# EAGLE board TiNRS&Navenant-Overstuurd (EAGLE 7.7.0), part 1 of 3
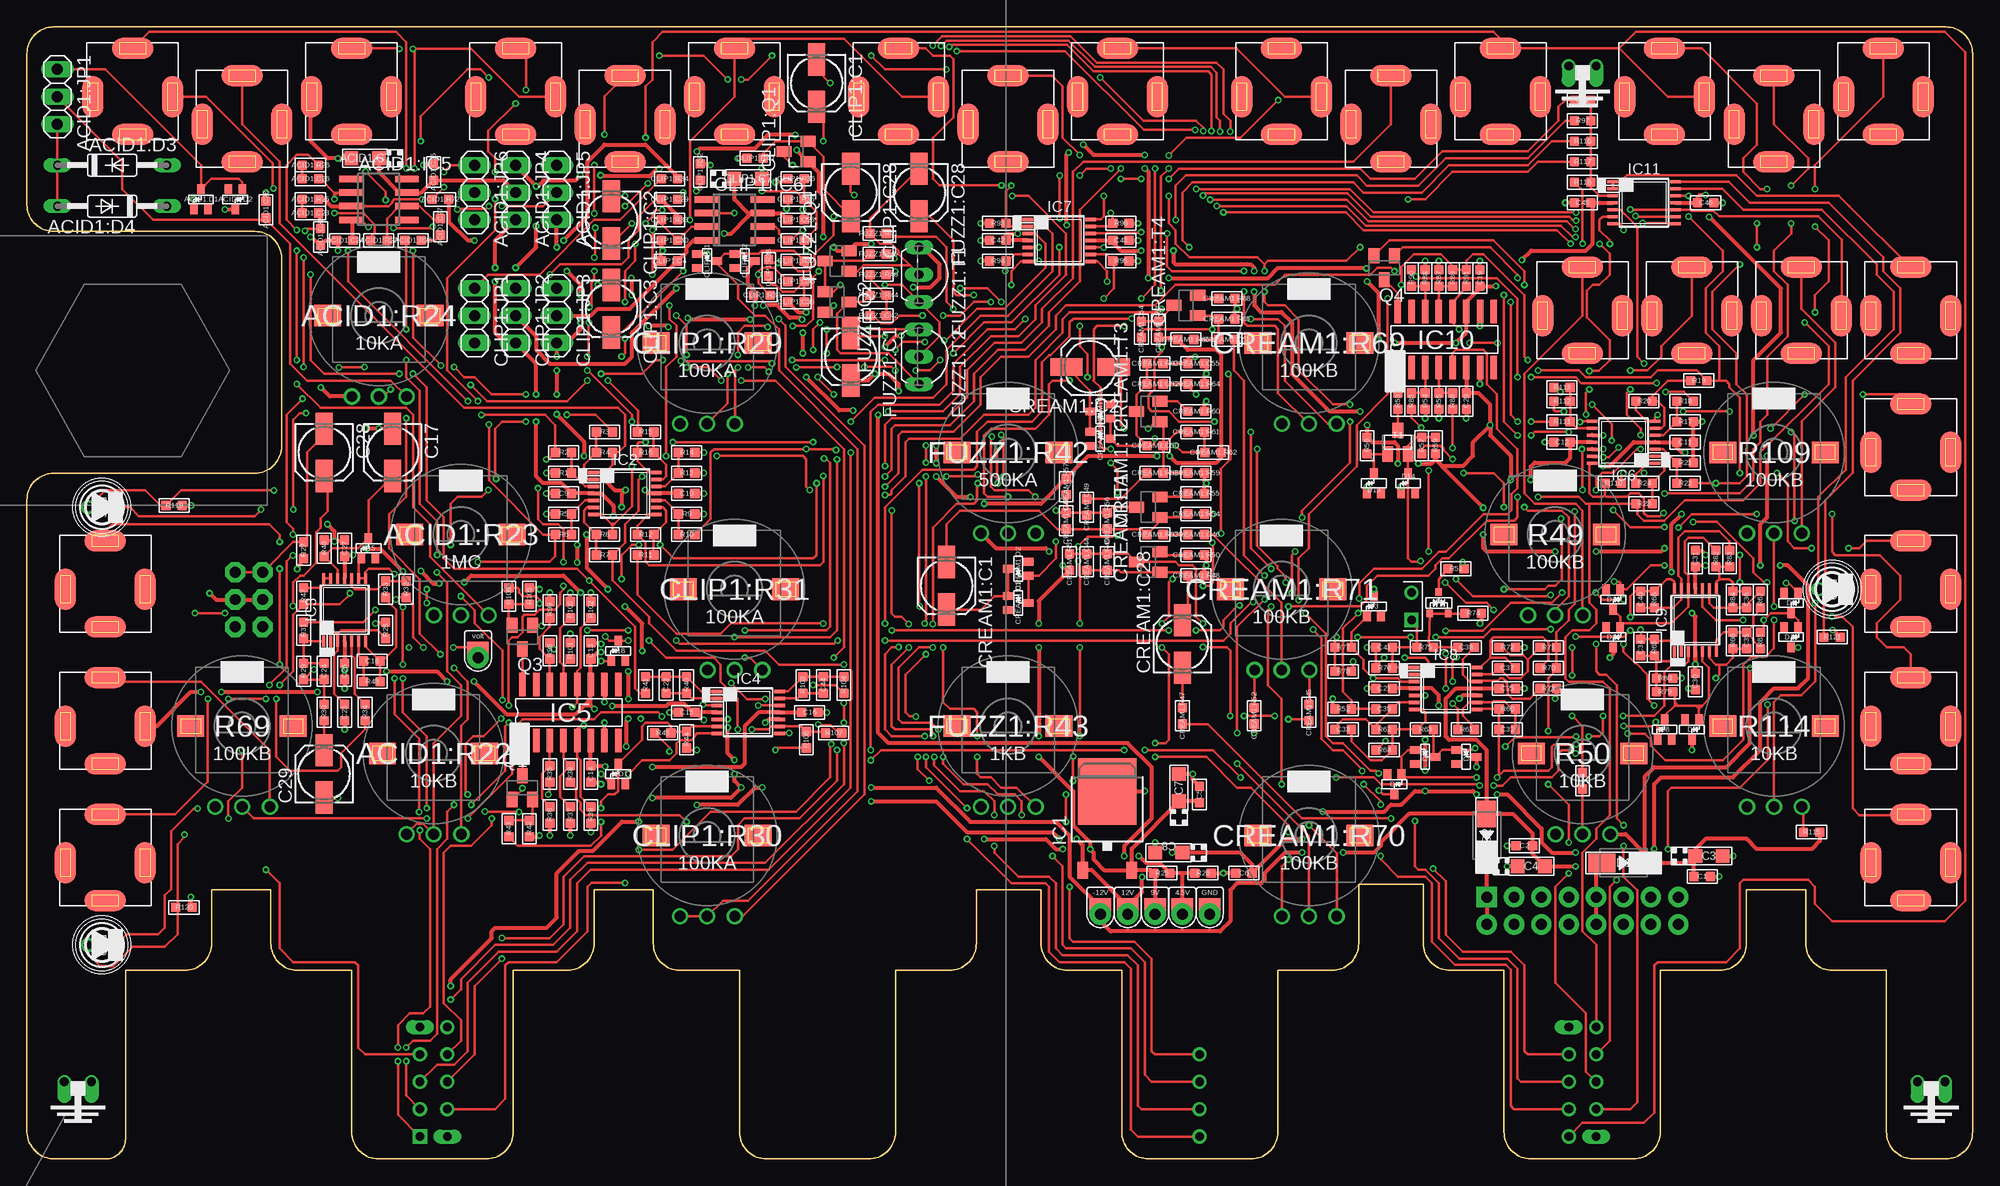
[diagram p0: board, top side]
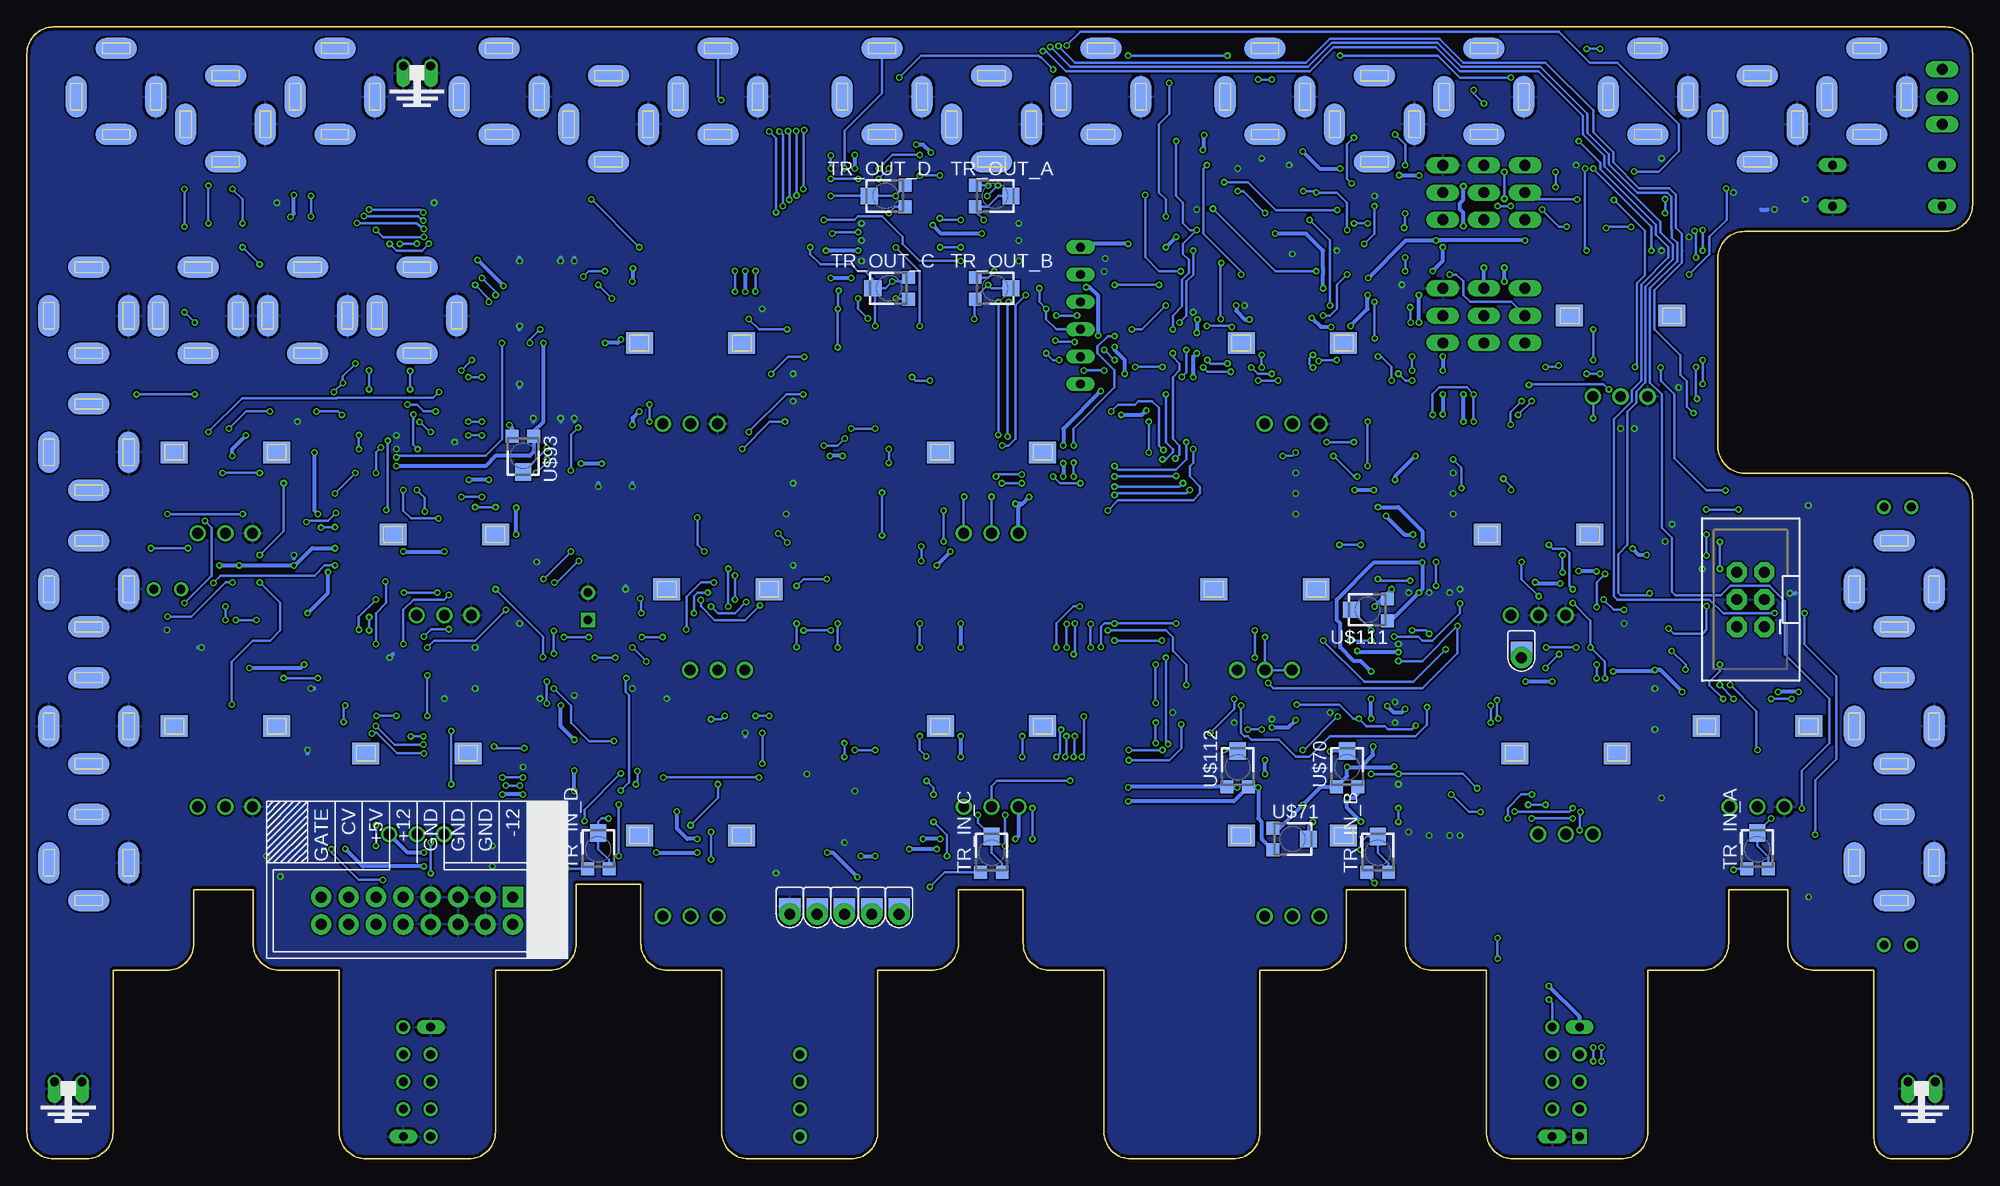
[diagram p1: board, bottom side, seen from below]

Size 180.66 x 105.08 mm. Coordinates in mm from the lower left corner, seen from the top.
Copper layers (1*16): Top 0.035mm / dielectric 1.5mm / Bottom 0.035mm
Design rules "ITeadstudio": minimum track width 6mil, minimum drill 12mil, track to track 6mil, track to pad 6mil, pad to pad 6mil, via to via 6mil, smd to smd 0mil, copper to edge 10mil, drill to drill 10mil, minimum pad ring 10mil, minimum via ring 6mil, stop-mask expansion 2mil, vias tented up to drill 100mil, thermal gap 10mil
Net classes: 0 default: width 0.254 mm; 1 power: width 0.381 mm

## Footprints (pad centres in the part's own frame; a part is rotated, then mirrored left to right if it is on the bottom)
CASE-A_3216 = smd 1.27 x 1.27: + -1.27,0; - 1.27,0
C0603 = smd 0.889 x 0.889: 1 -0.762,0; 2 0.762,0
SOT-323 = smd 0.7 x 0.9: ANODE -0.65,-0.95; CATHODE 0,0.95; NC 0.65,-0.95
DO35-10 = drill 0.813 long: A 5.08,0; C -5.08,0
SO08 = smd 0.6 x 2.2: 1 -1.905,-2.6; 2 -0.635,-2.6; 3 0.635,-2.6; 4 1.905,-2.6; 5 1.905,2.6; 6 0.635,2.6; 7 -0.635,2.6; 8 -1.905,2.6
1X03 = drill 1.016 long: 1 -2.54,0; 2 0,0; 3 2.54,0
ALPS_POT_SQUAREHOLES = drill 1: P$1 -2.5,-7.5; P$2 0,-7.5; P$3 2.58,-7.5 | smd 2.5 x 2: P$4 -4.75,0; P$5 4.75,0 | smd 2.5 x 2 bottom: P$6 -4.75,0; P$7 4.75,0
R0603 = smd 0.889 x 0.889: 1 -0.762,0; 2 0.762,0
153CLV-0505 = smd 3 x 1.6: + 2.2,0; - -2.2,0
SOT23 = smd 1 x 1.4: 1 -0.95,-1.1; 2 0.95,-1.1; 3 0,1.1
SOT23-BEC = smd 1 x 1.4: B -0.95,-1.1; C 0,1.1; E 0.95,-1.1
DO-214AC = smd 2.5 x 1.7: 1 -2,0; 2 2,0
3MMLED = drill 0.8: + -1.27,0; - 1.27,0
TO92-EBC = drill 0.813 long: B 0,-1.27; C 2.54,-1.27; E -2.54,-1.27
TO252 = smd 1 x 1.6: 1 -2.28,-4.8; 2 2.28,-4.8 | smd 5.4 x 6.2: 3 0,2.5
TSSOP14 = smd 0.305 x 0.991: 1 -1.95,-2.918; 2 -1.3,-2.918; 3 -0.65,-2.918; 4 0,-2.918; 5 0.65,-2.918; 6 1.3,-2.918; 7 1.95,-2.918; 8 1.95,2.918; 9 1.3,2.918; 10 0.65,2.918; 11 0,2.918; 12 -0.65,2.918; 13 -1.3,2.918; 14 -1.95,2.918
SO16 = smd 0.6 x 2.2: 1 -4.445,-2.6; 2 -3.175,-2.6; 3 -1.905,-2.6; 4 -0.635,-2.6; 5 0.635,-2.6; 6 1.905,-2.6; 7 3.175,-2.6; 8 4.445,-2.6; 9 4.445,2.6; 10 3.175,2.6; 11 1.905,2.6; 12 0.635,2.6; 13 -0.635,2.6; 14 -1.905,2.6; 15 -3.175,2.6; 16 -4.445,2.6
3.5MM-JACK-SWITCH-13MM-NOHOLES = smd 1.95 x 3.85 bottom: RING_B@1 -3.7,0; SWITCH_B@1 3.7,0 | smd 1.95 x 3.85: RING_T@3 -3.7,0; SWITCH_T@3 3.7,0 | smd 3.85 x 1.95 bottom: SECOND_B@1 0,-3.5; TIP_B@1 0,4.5 | smd 3.85 x 1.95: SECOND_T@3 0,-3.5; TIP_T@3 0,4.5
POWER_16_SHROUDED = drill 1.016 pad 1.88 square: 1 -8.89,-1.27 | drill 1.016 pad 1.88: 2 -8.89,1.27; 3 -6.35,-1.27; 4 -6.35,1.27; 5 -3.81,-1.27; 6 -3.81,1.27; 7 -1.27,-1.27; 8 -1.27,1.27; 9 1.27,-1.27; 10 1.27,1.27; 11 3.81,-1.27; 12 3.81,1.27; 13 6.35,-1.27; 14 6.35,1.27; 15 8.89,-1.27; 16 8.89,1.27
TC33X = smd 1.2 x 1.2: 1 -1,-1.825; 3 1,-1.825 | smd 1.5 x 1.6: 2 0,1.5
POWERTESTPAD = drill 1 pad 2: P$1 0,0 | smd 2 x 1.5: P$2 0,-0.75 | smd 2 x 1.5 bottom: P$3 0,-0.75
BYPASSBOARD = drill 0.8 long: 12V 31.75,15.24; GND 34.29,5.08; GND2 138.43,15.24; GND3 140.97,5.08 | drill 0.8 square: P$1 31.75,5.08 | drill 0.8: P$2 31.75,10.16; P$3 31.75,7.62; P$4 31.75,12.7; P$5 34.29,15.24; P$6 34.29,10.16; P$7 34.29,12.7; P$8 34.29,7.62; P$9 104.14,5.08; P$10 104.14,10.16; P$11 104.14,7.62; P$12 104.14,12.7; P$13 138.43,5.08; P$14 138.43,10.16; P$15 138.43,7.62; P$16 138.43,12.7; P$17 140.97,15.24; P$18 140.97,10.16; P$19 140.97,12.7; P$20 140.97,7.62
GROUNDLOOP = drill 0.8 offset: P$1 1.27,0; P$2 -1.27,0
2X3-SHROUDED = drill 1.016 pad 1.88 octagon: 1 -1.27,2.54; 2 1.27,2.54; 3 -1.27,0; 4 1.27,0; 5 -1.27,-2.54; 6 1.27,-2.54
SOT23' = smd 0.6 x 0.7: P$1 -0.85,-1; P$2 0.85,-1; P$3 0,1
TESTPAD_DUAL_PTH = drill 0.8 square: P$1 -1.27,0 | drill 0.8: P$2 1.27,0

## Placement (x,y rotation side)
ACID1:C7  10uF  [CASE-A_3216]  31.41,92.89 180 top
ACID1:C22  1nF  [C0603]  27.28,85.58 270 top
ACID1:C23  10nF  [C0603]  26.33,87.81 180 top
ACID1:C24  100n  [C0603]  29.5,85.27 180 top
ACID1:C25  100n  [C0603]  37.76,91.61 90 top
ACID1:C26  47nF  [C0603]  26.33,90.98 0 top
ACID1:C27  1uF  [C0603]  38.39,86.53 270 top
ACID1:C28  1nF  [C0603]  22.2,88.12 270 top
ACID1:D1  BAS16W  [SOT-323]  16.17,89.08 0 top
ACID1:D2  BAS16W  [SOT-323]  19.34,89.08 180 top
ACID1:D3  1N4148DO35-10  [DO35-10]  7.91,92.25 0 top
ACID1:D4  1N4148DO35-10  [DO35-10]  7.91,88.44 180 top
ACID1:IC5  UA741D  [SO08]  32.68,89.08 270 top
ACID1:JP1  GERMANIUMSELECTOR  [1X03]  2.83,98.6 270 top
ACID1:JP4  ACID+  [1X03]  45.38,89.71 270 top
ACID1:JP5  ACID-  [1X03]  49.19,89.71 270 top
ACID1:JP6  ACIDBIAS  [1X03]  41.57,89.71 270 top
ACID1:R22  10KB  [ALPS_POT_SQUAREHOLES]  37.76,37.64 0 top
ACID1:R23  1MC  [ALPS_POT_SQUAREHOLES]  40.3,57.96 0 top
ACID1:R24  10KA  [ALPS_POT_SQUAREHOLES]  32.68,78.28 0 top
ACID1:R25  10K  [R0603]  26.33,89.08 180 top
ACID1:R26  4.7K  [R0603]  26.33,92.25 0 top
ACID1:R27  1M  [R0603]  32.68,85.27 0 top
ACID1:R28  5.6K  [R0603]  35.85,85.27 0 top
ACID1:R72  1M  [R0603]  38.39,89.08 0 top
C1  100n  [C0603]  155.55,26.21 180 top
C2  100n  [C0603]  139.04,29.07 180 top
C3  10u  [CASE-A_3216]  156.18,28.11 0 top
C4  10u  [CASE-A_3216]  139.67,27.16 0 top
C5  100n  [C0603]  108.88,33.83 270 top
C6  100n  [C0603]  113,26.53 0 top
C7  10u  [CASE-A_3216]  106.97,34.47 90 top
C8  10u  [CASE-A_3216]  106.02,28.43 180 top
C9  100n  [C0603]  49.82,61.77 0 top
C10  100n  [C0603]  61.25,61.77 0 top
C11  100n  [C0603]  153.96,66.53 180 top
C12  100n  [C0603]  142.53,66.53 180 top
C13  100n  [C0603]  52.36,47.16 270 top
C14  100n  [C0603]  52.36,35.73 270 top
C15  100n  [C0603]  61.25,41.45 0 top
C16  100n  [C0603]  72.68,41.45 0 top
C17  10uF  [153CLV-0505]  33.95,65.58 270 top
C18  10pF  [C0603]  32.04,46.21 0 top
C19  100n  [C0603]  134.91,81.77 270 top
C20  100n  [C0603]  133.64,70.34 270 top
C21  100n  [C0603]  126.02,43.67 0 top
C22  10pF  [C0603]  59.35,43.99 90 top
C23  10pF  [C0603]  29.5,41.45 90 top
C24  47pF  [C0603]  27.6,45.26 270 top
C25  100n  [C0603]  137.45,43.67 0 top
C26  100n  [C0603]  29.5,45.26 90 top
C27  100n  [C0603]  29.5,56.69 90 top
C28  10uF  [153CLV-0505]  27.6,65.58 270 top
C29  10uF  [153CLV-0505]  27.6,35.73 90 top
C30  100n  [C0603]  154.91,44.31 90 top
C31  100n  [C0603]  154.91,55.74 90 top
C32  33p  [C0603]  137.45,39.86 0 top
C33  220p  [C0603]  122.21,39.86 180 top
C34  33p  [C0603]  149.83,47.48 90 top
C35  33p  [C0603]  159.68,48.12 270 top
C36  33p  [C0603]  159.68,51.93 270 top
C37  33p  [C0603]  137.45,45.58 180 top
C38  100n  [C0603]  133.64,47.48 180 top
C39  680n  [C0603]  126.02,41.77 0 top
C40  33p FIX  [C0603]  149.83,51.93 270 top
C41  33p FIX  [C0603]  126.02,47.48 180 top
C42  100n  [C0603]  90.14,85.27 0 top
C43  100n  [C0603]  101.57,85.27 0 top
C44  10pF  [C0603]  73.95,43.99 90 top
C45  100n  [C0603]  144.44,88.76 0 top
C46  100n  [C0603]  155.87,88.76 0 top
CLIP1:C1  4.7uF  [153CLV-0505]  73.32,99.87 270 top
CLIP1:C2  2.2uF  [153CLV-0505]  54.27,87.17 270 top
CLIP1:C3  4.7uF  [153CLV-0505]  54.27,78.92 270 top
CLIP1:C4  100n  [C0603]  59.66,83.36 180 top
CLIP1:C7  10uF  [CASE-A_3216]  66.97,90.98 0 top
CLIP1:C25  100n  [C0603]  71.41,87.17 0 top
CLIP1:C28  1uF  [153CLV-0505]  76.49,89.71 270 top
CLIP1:C29  22nF  [C0603]  59.66,89.08 180 top
CLIP1:C30  1nF  [C0603]  59.66,85.27 0 top
CLIP1:C31  100pF  [C0603]  71.41,85.27 180 top
CLIP1:C35  3.3nF  [C0603]  71.41,79.55 180 top
CLIP1:C36  22nF  [C0603]  71.41,81.45 180 top
CLIP1:D1  BAS16W  [SOT-323]  63.16,83.36 270 top
CLIP1:D2  BAS16W  [SOT-323]  66.65,83.36 270 top
CLIP1:IC6  UA741D  [SO08]  65.7,87.17 270 top
CLIP1:JP1  CLIPBIAS  [1X03]  41.57,78.28 270 top
CLIP1:JP2  CLIP+  [1X03]  45.38,78.28 270 top
CLIP1:JP3  CLIP-  [1X03]  49.19,78.28 270 top
CLIP1:Q1  SST201  [SOT23]  71.41,93.52 90 top
CLIP1:R29  100KA  [ALPS_POT_SQUAREHOLES]  63.16,75.74 0 top
CLIP1:R30  100KA  [ALPS_POT_SQUAREHOLES]  63.16,30.02 0 top
CLIP1:R31  100KA  [ALPS_POT_SQUAREHOLES]  65.7,52.88 0 top
CLIP1:R32  1M  [R0603]  62.52,91.61 90 top
CLIP1:R33  1K  [R0603]  59.66,87.17 180 top
CLIP1:R34  1M  [R0603]  59.66,90.98 0 top
CLIP1:R35  560R  [R0603]  71.41,89.08 0 top
CLIP1:R36  47R  [R0603]  71.41,90.98 0 top
CLIP1:R37  1K  [R0603]  71.41,83.36 0 top
CLIP1:R38  1.5K  [R0603]  68.87,82.72 270 top
CLIP1:R39  1M  [R0603]  68.24,80.19 0 top
CLIP1:R40  10K  [R0603]  67.6,92.89 0 top
CREAM1:C1  1uF  [153CLV-0505]  85.38,53.2 270 top
CREAM1:C2  1uF  [153CLV-0505]  98.72,73.52 180 top
CREAM1:C28  1uF  [153CLV-0505]  107.29,47.8 90 top
CREAM1:C44  470pF  [C0603]  98.4,55.42 90 top
CREAM1:C45  1uF  [C0603]  119.04,41.45 90 top
CREAM1:C46  100nF  [C0603]  108.56,57.96 180 top
CREAM1:C47  470pF  [C0603]  96.49,59.23 90 top
CREAM1:C49  100nF  [C0603]  98.4,60.5 90 top
CREAM1:C50  470pF  [C0603]  104.75,66.22 180 top
CREAM1:C52  4nF  [C0603]  104.75,71.93 0 top
CREAM1:C53  100nF  [C0603]  111.42,76.06 180 top
CREAM1:C54  100nF  [C0603]  103.48,77.01 270 top
CREAM1:C55  10nF  [C0603]  108.56,73.83 180 top
CREAM1:D1  BAS16W  [SOT-323]  92.05,51.61 270 top
CREAM1:D2  BAS16W  [SOT-323]  92.05,54.78 90 top
CREAM1:D3  BAS16W  [SOT-323]  99.67,69.39 90 top
CREAM1:D4  BAS16W  [SOT-323]  99.67,66.85 270 top
CREAM1:R47  39K  [R0603]  107.29,41.13 90 top
CREAM1:R48  47K  [R0603]  108.56,54.15 180 top
CREAM1:R49  470K  [R0603]  100.3,55.42 270 top
CREAM1:R50  100R  [R0603]  108.56,56.05 0 top
CREAM1:R51  10K  [R0603]  96.81,55.42 90 top
CREAM1:R52  1K  [R0603]  113.96,41.13 270 top
CREAM1:R53  10K  [R0603]  104.75,57.96 180 top
CREAM1:R54  100K  [R0603]  108.56,59.87 180 top
CREAM1:R55  150R  [R0603]  108.56,61.77 180 top
CREAM1:R56  470K  [R0603]  100.3,59.23 270 top
CREAM1:R57  10K  [R0603]  96.49,62.41 270 top
CREAM1:R58  10K  [R0603]  104.75,63.67 0 top
CREAM1:R59  100K  [R0603]  108.56,63.67 180 top
CREAM1:R60  150R  [R0603]  108.56,69.39 180 top
CREAM1:R61  470K  [R0603]  108.56,67.48 180 top
CREAM1:R62  10K  [R0603]  110.15,65.58 180 top
CREAM1:R63  39K  [R0603]  104.75,73.83 0 top
CREAM1:R64  22K  [R0603]  108.56,71.93 0 top
CREAM1:R65  100K  [R0603]  111.42,77.96 180 top
CREAM1:R66  430K  [R0603]  107.61,76.06 180 top
CREAM1:R67  15K  [R0603]  105.07,77.01 270 top
CREAM1:R68  3.3K  [R0603]  111.42,79.87 180 top
CREAM1:R69  100KB  [ALPS_POT_SQUAREHOLES]  119.04,75.74 0 top
CREAM1:R70  100KB  [ALPS_POT_SQUAREHOLES]  119.04,30.02 0 top
CREAM1:R71  100KB  [ALPS_POT_SQUAREHOLES]  116.5,52.88 0 top
CREAM1:T1  2n3904  [SOT23-BEC]  104.11,55.42 90 top
CREAM1:T2  2n3904  [SOT23-BEC]  104.11,60.5 90 top
CREAM1:T3  2n3904  [SOT23-BEC]  104.11,69.39 90 top
CREAM1:T4  2n3904  [SOT23-BEC]  107.61,79.23 90 top
D1  1n4001  [DO-214AC]  148.25,27.48 0 top
D2  1n4001  [DO-214AC]  135.55,30.02 270 top
D3  BAS16W  [SOT-323]  125.07,51.29 0 top
D4  BAS16W  [SOT-323]  126.97,34.78 180 top
D5  BAS16W  [SOT-323]  133.64,37.32 270 top
D6  BAS16W  [SOT-323]  129.83,37.32 270 top
D7  BAS16W  [SOT-323]  154.6,39.86 180 top
D8  BAS16W  [SOT-323]  152.06,39.86 0 top
D9  BAS16W  [SOT-323]  163.8,51.61 180 top
D10  BAS16W  [SOT-323]  147.29,51.93 180 top
D11  BAS16W  [SOT-323]  147.29,48.44 180 top
D12  BAS16W  [SOT-323]  163.8,48.44 180 top
D13  BAS16W  [SOT-323]  125.07,62.72 0 top
D14  BAS16W  [SOT-323]  128.24,62.72 0 top
D15  BAS16W  [SOT-323]  31.72,56.69 0 top
D16  [3MMLED]  6.96,60.5 0 top
D17  BAS16W  [SOT-323]  54.9,35.73 0 top
D18  BAS16W  [SOT-323]  54.9,47.16 0 top
D19  [3MMLED]  6.96,19.86 0 top
D20  [3MMLED]  167.61,52.88 0 top
FUZZ1:C1  20uF  [153CLV-0505]  76.49,74.47 270 top
FUZZ1:C28  2.2uF  [153CLV-0505]  82.84,89.71 270 top
FUZZ1:C42  10nF  [C0603]  79.03,78.28 180 top
FUZZ1:Q1  MMBT3906LT1SMD  [SOT23-BEC]  75.22,83.36 90 top
FUZZ1:Q2  MMBT3906LT1SMD  [SOT23-BEC]  75.22,79.55 270 top
FUZZ1:R41  100K  [R0603]  79.03,85.9 180 top
FUZZ1:R42  500KA  [ALPS_POT_SQUAREHOLES]  91.1,65.58 0 top
FUZZ1:R43  1KB  [ALPS_POT_SQUAREHOLES]  91.1,40.18 0 top
FUZZ1:R44  8.2K  [R0603]  79.03,80.19 180 top
FUZZ1:R45  33K  [R0603]  79.03,84 180 top
FUZZ1:R46  470R  [R0603]  79.03,82.09 180 top
FUZZ1:T1  [TO92-EBC]  84.11,82.09 270 top
FUZZ1:T2  [TO92-EBC]  84.11,74.47 270 top
IC1  7809DT  [TO252]  100.3,31.61 0 top
IC2  TL074TSSOP14  [TSSOP14]  55.54,61.77 270 top
IC3  TL074TSSOP14  [TSSOP14]  29.5,50.98 0 top
IC4  TL074TSSOP14  [TSSOP14]  66.97,41.45 270 top
IC5  LM13700M  [SO16]  50.46,41.45 0 top
IC6  TL074TSSOP14  [TSSOP14]  148.25,66.53 90 top
IC7  TL074TSSOP14  [TSSOP14]  95.86,85.27 270 top
IC8  TL074TSSOP14  [TSSOP14]  131.74,43.67 270 top
IC9  TL074TSSOP14  [TSSOP14]  154.91,50.02 0 top
IC10  LM13700M  [SO16]  131.74,76.06 0 top
IC11  TL074TSSOP14  [TSSOP14]  150.15,88.76 270 top
J1  JACK  [3.5MM-JACK-SWITCH-13MM-NOHOLES]  164.76,78.28 0 top
J2  POWERSHROUDED  [POWER_16_SHROUDED]  144.44,23.04 180 bottom
J3  JACK  [3.5MM-JACK-SWITCH-13MM-NOHOLES]  174.92,52.88 0 top
J4  JACK  [3.5MM-JACK-SWITCH-13MM-NOHOLES]  45.38,98.6 0 top
J5  JACK  [3.5MM-JACK-SWITCH-13MM-NOHOLES]  55.54,96.06 0 top
J6  JACK  [3.5MM-JACK-SWITCH-13MM-NOHOLES]  9.82,98.6 0 top
J7  JACK  [3.5MM-JACK-SWITCH-13MM-NOHOLES]  30.14,98.6 0 top
J8  JACK  [3.5MM-JACK-SWITCH-13MM-NOHOLES]  19.98,96.06 0 top
J9  JACK  [3.5MM-JACK-SWITCH-13MM-NOHOLES]  65.7,98.6 0 top
J10  JACK  [3.5MM-JACK-SWITCH-13MM-NOHOLES]  174.92,65.58 0 top
J11  JACK  [3.5MM-JACK-SWITCH-13MM-NOHOLES]  80.94,98.6 0 top
J12  JACK  [3.5MM-JACK-SWITCH-13MM-NOHOLES]  91.1,96.06 0 top
J13  JACK  [3.5MM-JACK-SWITCH-13MM-NOHOLES]  101.26,98.6 0 top
J14  JACK  [3.5MM-JACK-SWITCH-13MM-NOHOLES]  116.5,98.6 0 top
J15  JACK  [3.5MM-JACK-SWITCH-13MM-NOHOLES]  126.66,96.06 0 top
J16  JACK  [3.5MM-JACK-SWITCH-13MM-NOHOLES]  136.82,98.6 0 top
J17  JACK  [3.5MM-JACK-SWITCH-13MM-NOHOLES]  152.06,98.6 0 top
J18  JACK  [3.5MM-JACK-SWITCH-13MM-NOHOLES]  162.22,96.06 0 top
J19  JACK  [3.5MM-JACK-SWITCH-13MM-NOHOLES]  172.38,98.6 0 top
J20  JACK  [3.5MM-JACK-SWITCH-13MM-NOHOLES]  7.28,52.88 0 top
J21  JACK  [3.5MM-JACK-SWITCH-13MM-NOHOLES]  7.28,40.18 0 top
J22  JACK  [3.5MM-JACK-SWITCH-13MM-NOHOLES]  144.44,78.28 0 top
J23  JACK  [3.5MM-JACK-SWITCH-13MM-NOHOLES]  154.6,78.28 0 top
J24  JACK  [3.5MM-JACK-SWITCH-13MM-NOHOLES]  7.28,27.48 0 top
J25  JACK  [3.5MM-JACK-SWITCH-13MM-NOHOLES]  174.92,40.18 0 top
J26  JACK  [3.5MM-JACK-SWITCH-13MM-NOHOLES]  174.92,27.48 0 top
J27  JACK  [3.5MM-JACK-SWITCH-13MM-NOHOLES]  174.92,78.28 0 top
PCB1  EURORACK_PCB5STOMP  [EURORACK36HP_5STOMP]  -0.34,-3 0 top
Q1  MMBT3906LT1SMD  [SOT23-BEC]  46.01,34.47 0 top
Q3  MMBT3906LT1SMD  [SOT23-BEC]  46.01,48.44 180 top
Q4  MMBT3906LT1SMD  [SOT23-BEC]  126.02,82.72 180 top
R1  100k  [R0603]  49.82,63.67 180 top
R2  100k  [R0603]  49.82,65.58 180 top
R3  100k  [R0603]  53.63,67.48 0 top
R4  100k  [R0603]  53.63,65.58 180 top
R5  100k  [R0603]  49.82,59.87 180 top
R6  100k  [R0603]  49.82,57.96 180 top
R7  100k  [R0603]  53.63,56.05 0 top
R8  100k  [R0603]  53.63,57.96 180 top
R9  100k  [R0603]  61.25,59.87 0 top
R10  100k  [R0603]  61.25,57.96 0 top
R11  100k  [R0603]  57.44,56.05 180 top
R12  100k  [R0603]  57.44,57.96 0 top
R13  100k  [R0603]  61.25,63.67 0 top
R14  100k  [R0603]  61.25,65.58 0 top
R15  100k  [R0603]  57.44,67.48 180 top
R16  100k  [R0603]  57.44,65.58 0 top
R17  100k  [R0603]  153.96,68.44 0 top
R18  100k  [R0603]  153.96,70.34 0 top
R19  100k  [R0603]  155.23,72.25 0 top
R20  100k  [R0603]  150.15,70.34 0 top
R21  100k  [R0603]  153.96,64.63 0 top
R22  100k  [R0603]  153.96,62.72 0 top
R23  100k  [R0603]  150.15,60.82 180 top
R24  100k  [R0603]  150.15,62.72 0 top
R25  100k  [R0603]  105.38,26.53 180 top
R26  100k  [R0603]  109.19,26.53 180 top
R27  1M  [R0603]  25.69,56.5 90 top
R28  150K  [R0603]  33.31,49.07 270 top
R29  10K  [R0603]  25.69,45.26 90 top
R30  470R  [R0603]  27.6,41.45 90 top
R31  1K  [R0603]  25.69,49.07 90 top
R32  100K  [R0603]  35.22,52.88 270 top
R33  100K  [R0603]  33.31,52.88 270 top
R34  100k  [R0603]  31.41,41.45 90 top
R35  4.7K  [R0603]  48.55,35.73 90 top
R36  10R  [R0603]  48.55,31.92 90 top
R37  10R  [R0603]  50.46,31.92 270 top
R38  100K  [R0603]  50.46,35.73 270 top
R39  100K  [R0603]  52.36,31.92 270 top
R40  100K  [R0603]  61.25,43.99 90 top
R41  1K  [R0603]  57.44,43.99 270 top
R42  10K  [R0603]  46.65,30.66 90 top
R43  100K  [R0603]  44.74,30.66 90 top
R44  100K  [R0603]  61.25,38.91 90 top
R45  330K  [R0603]  59.03,39.55 0 top
R46  330K  [R0603]  27.6,56.69 270 top
R47  1K  [R0603]  25.69,52.24 90 top
R48  100k  [R0603]  32.04,44.31 0 top
R49  100KB  [ALPS_POT_SQUAREHOLES]  141.9,57.96 0 top
R50  10KB  [ALPS_POT_SQUAREHOLES]  144.44,37.64 0 top
R51  14  [R0603]  132.69,54.78 0 top
R52  470K  [R0603]  122.21,41.77 180 top
R53  4K7  [R0603]  127.29,70.34 90 top
R54  100  [R0603]  129.83,70.34 90 top
R55  100  [R0603]  131.1,70.34 90 top
R56  470K  [R0603]  124.43,66.22 90 top
R57  22K  [R0603]  129.51,66.22 270 top
R58  33K  [R0603]  144.44,35.1 270 top
R59  4M7  [R0603]  130.78,66.22 90 top
R60  10K  [R0603]  137.45,41.77 0 top
R61  47K  [R0603]  133.64,39.86 180 top
R62  33K  [R0603]  126.02,39.86 180 top
R63  33K  [R0603]  129.83,39.86 180 top
R64  100K  [R0603]  126.02,37.96 0 top
R65  100K  [R0603]  151.1,47.48 90 top
R66  100K  [R0603]  158.41,48.12 270 top
R67  100K  [R0603]  160.95,51.93 270 top
R68  100K  [R0603]  151.1,51.93 270 top
R69  100KB  [ALPS_POT_SQUAREHOLES]  19.98,40.18 0 top
R70  100  [R0603]  141.26,45.58 180 top
R71  100K  [R0603]  141.26,47.48 180 top
R72  10K  [R0603]  137.45,47.48 0 top
R73  220K  [R0603]  141.26,43.67 180 top
R74  10K  [R0603]  134.28,50.66 180 top
R75  6K8  [R0603]  129.83,47.48 0 top
R76  100K  [R0603]  126.02,45.58 0 top
R77  33K  [R0603]  122.21,47.48 0 top
R78  100K  [R0603]  122.21,45.26 0 top
R79  33K  [R0603]  152.06,43.35 180 top
R80  100K  [R0603]  152.06,44.62 180 top
R81  33K  [R0603]  160.95,48.12 270 top
R82  33K  [R0603]  156.82,55.74 270 top
R83  100K  [R0603]  158.09,55.74 270 top
R84  100K  [R0603]  158.41,51.93 270 top
R85  27k  [R0603]  128.56,70.34 270 top
R86  150k  [R0603]  132.37,70.34 270 top
R87  1k  [R0603]  131.1,81.77 270 top
R88  1k  [R0603]  129.83,81.77 270 top
R89  200k  [R0603]  132.37,81.77 90 top
R90  200k  [R0603]  128.56,81.77 90 top
R91  47k  [R0603]  133.64,81.77 270 top
R92  100K  [R0603]  144.44,98.28 0 top
R93  4.7k  [R0603]  90.14,86.85 180 top
R94  4.7k  [R0603]  90.14,83.36 180 top
R95  4.7k  [R0603]  101.57,83.36 0 top
R96  4.7k  [R0603]  101.57,86.85 0 top
R97  100K  [R0603]  144.44,96.38 0 top
R98  4.7K  [R0603]  48.55,47.16 270 top
R99  10R  [R0603]  48.55,50.98 270 top
R100  10R  [R0603]  50.46,50.98 90 top
R101  100K  [R0603]  50.46,47.16 90 top
R102  100K  [R0603]  52.36,50.98 90 top
R103  100K  [R0603]  72.05,43.99 90 top
R104  1K  [R0603]  75.86,43.99 270 top
R105  10K  [R0603]  46.65,52.24 270 top
R106  100K  [R0603]  44.74,52.24 270 top
R107  100K  [R0603]  74.9,39.55 180 top
R108  330K  [R0603]  72.36,38.91 90 top
R109  100KB  [ALPS_POT_SQUAREHOLES]  162.22,65.58 0 top
R110  47k  [R0603]  147.29,62.72 0 top
R111  2.2k  [R0603]  142.53,68.44 0 top
R112  18k  [R0603]  142.53,70.34 180 top
R113  18k  [R0603]  142.53,71.61 180 top
R114  10KB  [ALPS_POT_SQUAREHOLES]  162.22,40.18 0 top
R115  14k  [R0603]  165.71,30.34 180 top
R116  100K  [R0603]  144.44,94.47 0 top
R117  100K  [R0603]  144.44,92.57 0 top
R118  100K  [R0603]  144.44,90.66 0 top
R119  1.2K  [R0603]  13.66,60.65 180 top
R120  1.2K  [R0603]  14.58,23.35 180 top
R121  1.2K  [R0603]  167.61,48.44 180 top
T1  3906  [SOT23-BEC]  127.29,66.53 0 top
TR_IN_A  50k  [TC33X]  19.98,28.75 0 bottom
TR_IN_B  50k  [TC33X]  55.22,28.43 0 bottom
TR_IN_C  50k  [TC33X]  91.1,28.43 0 bottom
TR_IN_D  50k  [TC33X]  127.61,28.75 0 bottom
TR_OUT_A  50k  [TC33X]  90.78,89.39 270 bottom
TR_OUT_B  50k  [TC33X]  90.78,80.82 270 bottom
TR_OUT_C  50k  [TC33X]  100.62,80.82 90 bottom
TR_OUT_D  50k  [TC33X]  100.94,89.39 90 bottom
U$13  VOLTAGETESTPAD  [POWERTESTPAD]  102.21,22.72 180 top
U$15  VOLTAGETESTPAD  [POWERTESTPAD]  41.88,46.53 180 top
U$22  5STOMPBOARD  [BYPASSBOARD]  4.74,-3 0 top
U$23  HEADPHONEHOLE_BIGGAP  [HEADPHONEHOLE_GAP]  9.82,73.2 180 top
U$41  VOLTAGETESTPAD  [POWERTESTPAD]  99.67,22.72 180 top
U$42  VOLTAGETESTPAD  [POWERTESTPAD]  104.75,22.72 180 top
U$43  VOLTAGETESTPAD  [POWERTESTPAD]  109.83,22.72 180 top
U$44  VOLTAGETESTPAD  [POWERTESTPAD]  107.29,22.72 180 top
U$48  GNDLOOP  [GROUNDLOOP]  176.82,7.16 0 top
U$49  GNDLOOP  [GROUNDLOOP]  144.44,101.46 0 top
U$50  GNDLOOP  [GROUNDLOOP]  4.74,7.16 0 top
U$68  HEADPHONE  [2X3-SHROUDED]  20.61,51.93 180 bottom
U$70  100k  [TC33X]  58.08,36.37 0 bottom
U$71  100k  [TC33X]  63.16,29.7 270 bottom
U$74  BAT54S  [SOT23']  131.1,51.61 0 top
U$92  TESTPOINT_DUAL_PTH  [TESTPAD_DUAL_PTH]  128.56,51.29 90 top
U$93  50K  [TC33X]  134.59,65.26 180 bottom
U$111  100k  [TC33X]  56.17,50.98 90 bottom
U$112  100k  [TC33X]  68.24,36.37 0 bottom

## Library data of the parts
ACID1:C7 C3 C4 C7 C8 CLIP1:C7 IC2-IC4 IC6-IC9 IC11 J2 PCB1 U$22 U$23 = EurorackModularParts
ACID1:C22-ACID1:C28 ACID1:R25-ACID1:R28 ACID1:R72 C1 C2 C5 C6 C9-C16 C18-C27 C30-C46 CLIP1:C4 CLIP1:C25 CLIP1:C29-CLIP1:C31 CLIP1:C35 CLIP1:C36 CLIP1:R32-CLIP1:R40 CREAM1:C44-CREAM1:C47 CREAM1:C49 CREAM1:C50 CREAM1:C52-CREAM1:C55 CREAM1:R47-CREAM1:R68 D1 D2 FUZZ1:C42 FUZZ1:R41 FUZZ1:R44-FUZZ1:R46 R1-R48 R51-R68 R70-R108 R110-R113 R115-R121 = OPL
ACID1:D1 ACID1:D2 CLIP1:D1 CLIP1:D2 CREAM1:D1-CREAM1:D4 D3-D15 D17 D18 U$48-U$50 U$74 U$92 = FenixBase
ACID1:D3 ACID1:D4 = diode
ACID1:IC5 CLIP1:IC6 = linear
ACID1:JP1 = pinhead@1
ACID1:JP4-ACID1:JP6 CLIP1:JP1-CLIP1:JP3 = pinhead
ACID1:R22 CLIP1:R30 CREAM1:R70 = EurorackModularParts; DESC: Tone
ACID1:R23 CLIP1:R31 CREAM1:R71 FUZZ1:R43 = EurorackModularParts; DESC: Distortion
ACID1:R24 CLIP1:R29 CREAM1:R69 FUZZ1:R42 = EurorackModularParts; DESC: Volume
C17 C28 C29 IC1 = adafruit@1
CLIP1:C1-CLIP1:C3 CLIP1:C28 CREAM1:C1 CREAM1:C2 CREAM1:C28 FUZZ1:C1 FUZZ1:C28 TR_IN_A TR_IN_B TR_IN_C TR_IN_D TR_OUT_A TR_OUT_B TR_OUT_C TR_OUT_D U$70 U$71 U$93 U$111 U$112 = adafruit
CLIP1:Q1 = transistor-fet
CREAM1:T1-CREAM1:T4 = transistor-neu-to92
D16 = EurorackModularParts; DESC: InputLed
D19 = EurorackModularParts; DESC: EnvelLed
D20 = EurorackModularParts; DESC: OutputLed
FUZZ1:Q1 FUZZ1:Q2 Q1 Q3 Q4 = transistor-pnp
FUZZ1:T1 FUZZ1:T2 = transistor-neu-to92@1
IC5 IC10 = ota
J1 = EurorackModularParts; DESC: VCA2in
J3 = EurorackModularParts; DESC: Master Output
J4 = EurorackModularParts; DESC: Input B
J5 = EurorackModularParts; DESC: Difference B
J6 = EurorackModularParts; DESC: Input A
J7 = EurorackModularParts; DESC: Output A
J8 = EurorackModularParts; DESC: Difference A
J9 = EurorackModularParts; DESC: Output B
J10 = EurorackModularParts; DESC: Master Difference
J11 = EurorackModularParts; DESC: Input C
J12 = EurorackModularParts; DESC: Difference C
J13 = EurorackModularParts; DESC: Output C
J14 = EurorackModularParts; DESC: Input D
J15 = EurorackModularParts; DESC: Difference D
J16 = EurorackModularParts; DESC: Output D
J17 = EurorackModularParts; DESC: Input E
J18 = EurorackModularParts; DESC: Difference E
J19 = EurorackModularParts; DESC: Output E
J20 = EurorackModularParts; DESC: Master Input
J21 = EurorackModularParts; DESC: Drive CV
J22 R49 = EurorackModularParts; DESC: Mod
J23 = EurorackModularParts; DESC: Bias
J24 = EurorackModularParts; DESC: Envelope Out
J25 R114 = EurorackModularParts; DESC: Wet/Dry
J26 = EurorackModularParts; DESC: Cross Output
J27 = EurorackModularParts; DESC: Sum Out
R50 = EurorackModularParts; DESC: Level
R69 = EurorackModularParts; DESC: Drive
R109 = EurorackModularParts; DESC: Post-gain
T1 = transistor
U$13 = FenixBase; DESC: 12V
U$15 = FenixBase; DESC: volt
U$41 = FenixBase; DESC: -12V
U$42 = FenixBase; DESC: 9V
U$43 = FenixBase; DESC: GND
U$44 = FenixBase; DESC: 4.5V
U$68 = SparkFun-Connectors

## Nets
4.5V [power]: ACID1:R72.2 CLIP1:R34.2 R25.1 R26.2 U$44.P$1 U$44.P$2 U$44.P$3
9V [power]: ACID1:JP4.1 C5.2 C7.+ CLIP1:JP2.1 CLIP1:Q1.1 CREAM1:R51.1 CREAM1:R57.1 CREAM1:R62.1 CREAM1:R66.2 CREAM1:R67.2 FUZZ1:C1.+ FUZZ1:Q1.E FUZZ1:R42.P$1 FUZZ1:R43.P$1 FUZZ1:T1.E IC1.2 R25.2 U$42.P$1 U$42.P$2 U$42.P$3
12V [power]: ACID1:JP4.3 C1.2 C3.+ C6.2 C8.+ C9.2 C11.2 C13.2 C15.2 C19.2 C21.2 C26.2 C30.2 C42.2 C45.2 CLIP1:JP2.3 D1.2 IC1.1 IC2.4 IC3.4 IC4.4 IC5.11 IC6.4 IC7.4 IC8.4 IC9.4 IC10.11 IC11.4 J21.SWITCH_B@1 J21.SWITCH_T@3 R50.P$3 R115.1 U$13.P$1 U$13.P$2 U$13.P$3 U$22.12V U$70.3 U$71.3 U$93.1 U$111.3 U$112.3
-12V [power]: ACID1:JP5.3 C2.1 C4.- C10.1 C12.1 C14.1 C16.1 C20.1 C25.1 C27.1 C31.1 C43.1 C46.1 CLIP1:JP3.3 D2.1 IC2.11 IC3.11 IC4.11 IC5.6 IC6.11 IC7.11 IC8.11 IC9.11 IC10.6 IC11.11 R56.2 R59.1 U$41.P$1 U$41.P$2 U$41.P$3 U$70.1 U$71.1 U$93.3 U$111.1 U$112.1
ACID1:ACIDNE: ACID1:C24.1 ACID1:IC5.4 ACID1:JP5.2
ACID1:ACIDPL: ACID1:C7.+ ACID1:C25.1 ACID1:IC5.7 ACID1:JP4.2
ACID1:ACIDVI: ACID1:IC5.3 ACID1:JP6.2 ACID1:R25.1
ACID1:N$2: ACID1:D3.C ACID1:D4.A ACID1:JP1.3
ACID1:N$3: ACID1:D1.CATHODE ACID1:D2.ANODE ACID1:JP1.1
ACID1:N$20: ACID1:C23.2 ACID1:R25.2
ACID1:N$22: ACID1:C26.2 ACID1:IC5.2 ACID1:R27.1
ACID1:N$23: ACID1:C26.1 ACID1:R26.1
ACID1:N$32: ACID1:C27.1 ACID1:IC5.6 ACID1:R27.2
ACID1:N$33: ACID1:R23.P$3 ACID1:R26.2
ACID1:N$34: ACID1:C28.2 ACID1:JP1.2 ACID1:R22.P$3 ACID1:R24.P$3
ACID1:N$35: ACID1:C27.2 ACID1:R28.2
ACID1:N$36: ACID1:R22.P$1 ACID1:R22.P$2 ACID1:R28.1
ACID1:TO4.5V: ACID1:JP6.1 ACID1:R72.1
BIASINPUT: J23.TIP_B@1 J23.TIP_T@3 R61.2
BIASMAINLINE: C32.1 D4.ANODE D6.ANODE D8.ANODE D9.ANODE D10.ANODE IC8.8 R60.1
CLIP1:CLIPNE: CLIP1:C4.1 CLIP1:IC6.4 CLIP1:JP3.2
CLIP1:CLIPPL: CLIP1:C7.+ CLIP1:C25.1 CLIP1:IC6.7 CLIP1:JP2.2
CLIP1:CLIPVI: CLIP1:C29.2 CLIP1:JP1.2 CLIP1:R33.1
CLIP1:N$38: CLIP1:C30.2 CLIP1:IC6.3 CLIP1:R33.2
CLIP1:N$41: CLIP1:JP1.1 CLIP1:R34.1
CLIP1:N$42: CLIP1:C31.1 CLIP1:IC6.2 CLIP1:R31.P$1 CLIP1:R31.P$2 CLIP1:R35.2 CLIP1:R36.2
CLIP1:N$43: CLIP1:C1.+ CLIP1:C31.2 CLIP1:IC6.6 CLIP1:R31.P$3
CLIP1:N$44: CLIP1:C1.- CLIP1:R37.1
CLIP1:N$45: CLIP1:D1.CATHODE CLIP1:D2.ANODE CLIP1:R30.P$1 CLIP1:R30.P$2 CLIP1:R37.2
CLIP1:N$46: CLIP1:R30.P$3 CLIP1:R38.1
CLIP1:N$47: CLIP1:C2.+ CLIP1:R36.1
CLIP1:N$48: CLIP1:C3.+ CLIP1:R35.1
CLIP1:N$49: CLIP1:C35.1 CLIP1:C36.1 CLIP1:R38.2
CLIP1:N$50: CLIP1:C36.2 CLIP1:Q1.3 CLIP1:R39.2
CLIP1:N$51: CLIP1:C28.+ CLIP1:Q1.2 CLIP1:R40.2
CLIP1:N$52: CLIP1:C28.- CLIP1:R29.P$3
CREAM1:N$1: CREAM1:C28.- CREAM1:R47.2
CREAM1:N$61: CREAM1:C28.+ CREAM1:C44.1 CREAM1:R48.2 CREAM1:R49.2 CREAM1:T1.B
CREAM1:N$62: CREAM1:R50.1 CREAM1:T1.E
CREAM1:N$63: CREAM1:C44.2 CREAM1:C45.1 CREAM1:R49.1 CREAM1:R51.2 CREAM1:T1.C
CREAM1:N$64: CREAM1:C45.2 CREAM1:R71.P$3
CREAM1:N$65: CREAM1:C1.- CREAM1:C47.1 CREAM1:R53.2 CREAM1:R54.2 CREAM1:R56.2 CREAM1:T2.B
CREAM1:N$66: CREAM1:C1.+ CREAM1:D1.ANODE CREAM1:D2.CATHODE
CREAM1:N$67: CREAM1:R55.2 CREAM1:T2.E
CREAM1:N$68: CREAM1:C47.2 CREAM1:C49.1 CREAM1:D1.CATHODE CREAM1:D2.ANODE CREAM1:R56.1 CREAM1:R57.2 CREAM1:T2.C
CREAM1:N$69: CREAM1:C49.2 CREAM1:R58.1
CREAM1:N$70: CREAM1:C2.- CREAM1:C50.1 CREAM1:R58.2 CREAM1:R59.2 CREAM1:R61.2 CREAM1:T3.B
CREAM1:N$71: CREAM1:R60.2 CREAM1:T3.E
CREAM1:N$72: CREAM1:C50.2 CREAM1:C52.1 CREAM1:D3.ANODE CREAM1:D4.CATHODE CREAM1:R61.1 CREAM1:R62.2 CREAM1:R63.1 CREAM1:T3.C
CREAM1:N$73: CREAM1:C53.1 CREAM1:R70.P$2
CREAM1:N$74: CREAM1:C55.2 CREAM1:R63.2 CREAM1:R70.P$1
CREAM1:N$75: CREAM1:C52.2 CREAM1:R64.1 CREAM1:R70.P$3
CREAM1:N$76: CREAM1:C2.+ CREAM1:D3.CATHODE CREAM1:D4.ANODE
CREAM1:N$77: CREAM1:C53.2 CREAM1:R65.2 CREAM1:R66.1 CREAM1:T4.B
CREAM1:N$78: CREAM1:C54.1 CREAM1:R67.1 CREAM1:T4.C
CREAM1:N$79: CREAM1:R68.2 CREAM1:T4.E
CREAM1:N$80: CREAM1:C54.2 CREAM1:R69.P$3
CREAM1:N$84: CREAM1:R52.1 CREAM1:R71.P$1
CREAM1:N$85: CREAM1:C46.2 CREAM1:R53.1
CREAM1:N$86: CREAM1:C46.1 CREAM1:R71.P$2
CROSSFADER_OUT: IC6.14 J26.TIP_B@1 J26.TIP_T@3 R110.1
CV_IN: J25.TIP_B@1 J25.TIP_T@3 R112.2
ENVELOPE_OUT: IC11.10 J1.SWITCH_B@1 J1.SWITCH_T@3 J24.TIP_B@1 J24.TIP_T@3 R47.1
EURORACK_IN: J20.TIP_B@1 J20.TIP_T@3 R34.1
FUZZ1:N$53: FUZZ1:Q2.E FUZZ1:R41.1 FUZZ1:R43.P$3 FUZZ1:T2.E
FUZZ1:N$54: FUZZ1:C28.- FUZZ1:Q1.B FUZZ1:R41.2 FUZZ1:T1.B
FUZZ1:N$55: FUZZ1:Q1.C FUZZ1:Q2.B FUZZ1:R45.2 FUZZ1:T1.C FUZZ1:T2.B
FUZZ1:N$56: FUZZ1:C1.- FUZZ1:R43.P$2
FUZZ1:N$57: FUZZ1:C42.2 FUZZ1:R42.P$3
FUZZ1:N$58: FUZZ1:C42.1 FUZZ1:R44.1 FUZZ1:R46.2
FUZZ1:N$59: FUZZ1:Q2.C FUZZ1:R44.2 FUZZ1:T2.C
GND [power]: ACID1:C7.- ACID1:C22.2 ACID1:C24.2 ACID1:C25.2 ACID1:C28.1 ACID1:D1.ANODE ACID1:D2.CATHODE ACID1:D3.A ACID1:D4.C ACID1:JP5.1 ACID1:R23.P$1 ACID1:R23.P$2 ACID1:R24.P$1 C1.1 C2.2 C3.- C4.+ C5.1 C6.1 C7.- C8.- C9.1 C10.2 C11.1 C12.2 C13.1 C14.2 C15.1 C16.2 C17.- C19.1 C20.2 C21.1 C23.1 C25.2 C26.1 C27.2 C29.- C30.1 C31.2 C42.1 C43.2 C45.1 C46.2 CLIP1:C2.- CLIP1:C3.- CLIP1:C4.2 CLIP1:C7.- CLIP1:C25.2 CLIP1:C30.1 CLIP1:C35.2 CLIP1:D1.ANODE CLIP1:D2.CATHODE CLIP1:JP3.1 CLIP1:R29.P$1 CLIP1:R32.2 CLIP1:R39.1 CLIP1:R40.1 CREAM1:C55.1 CREAM1:R48.1 CREAM1:R50.2 CREAM1:R52.2 CREAM1:R54.1 CREAM1:R55.1 CREAM1:R59.1 CREAM1:R60.1 CREAM1:R64.2 CREAM1:R65.1 CREAM1:R68.1 CREAM1:R69.P$1 D3.CATHODE D5.CATHODE D7.CATHODE D11.CATHODE D12.CATHODE D13.ANODE D14.ANODE FUZZ1:R45.1 FUZZ1:R46.1 IC1.3 IC4.5 IC4.10 IC5.7 IC5.10 IC6.10 IC6.12 IC8.5 IC8.10 IC10.7 IC10.10 J1.RING_B@1 J1.RING_T@3 J2.3 J2.4 J2.5 J2.6 J2.7 J2.8 J3.RING_B@1 J3.RING_T@3 J4.RING_B@1 J4.RING_T@3 J5.RING_B@1 J5.RING_T@3 J6.RING_B@1 J6.RING_T@3 J7.RING_B@1 J7.RING_T@3 J8.RING_B@1 J8.RING_T@3 J9.RING_B@1 J9.RING_T@3 J10.RING_B@1 J10.RING_T@3 J11.RING_B@1 J11.RING_T@3 J12.RING_B@1 J12.RING_T@3 J13.RING_B@1 J13.RING_T@3 J14.RING_B@1 J14.RING_T@3 J15.RING_B@1 J15.RING_T@3 J16.RING_B@1 J16.RING_T@3 J17.RING_B@1 J17.RING_T@3 J18.RING_B@1 J18.RING_T@3 J19.RING_B@1 J19.RING_T@3 J20.RING_B@1 J20.RING_T@3 J20.SWITCH_B@1 J20.SWITCH_T@3 J21.RING_B@1 J21.RING_T@3 J22.RING_B@1 J22.RING_T@3 J23.RING_B@1 J23.RING_T@3 J23.SWITCH_B@1 J23.SWITCH_T@3 J24.RING_B@1 J24.RING_T@3 J25.RING_B@1 J25.RING_T@3 J25.SWITCH_B@1 J25.SWITCH_T@3 J26.RING_B@1 J26.RING_T@3 J27.RING_B@1 J27.RING_T@3 R1.2 R5.2 R9.2 R13.2 R17.2 R21.2 R26.1 R27.1 R28.1 R36.1 R37.2 R39.2 R42.1 R46.1 R49.P$1 R50.P$1 R51.2 R52.2 R54.1 R55.1 R69.P$1 R72.2 R73.1 R74.1 R87.1 R88.1 R93.2 R94.2 R95.2 R96.2 R99.1 R100.2 R102.2 R105.1 R109.P$1 R114.P$1 R119.1 R120.1 R121.1 U$22.GND U$22.GND2 U$22.GND3 U$43.P$1 U$43.P$2 U$43.P$3 U$48.P$1 U$48.P$2 U$49.P$1 U$49.P$2 U$50.P$1 U$50.P$2 U$68.3 U$68.4 U$92.P$2
GUITAR_IN: C28.- R27.2 U$68.5 U$68.6
GUITAR_OUT: R31.2 R32.2 U$15.P$1 U$15.P$2 U$15.P$3
INPUT_A: J6.TIP_B@1 J6.TIP_T@3 R2.2 U$22.P$3
INPUT_B: J4.TIP_B@1 J4.TIP_T@3 R6.2 U$22.P$7
INPUT_C: J11.TIP_B@1 J11.TIP_T@3 R10.2 U$22.P$11
INPUT_D: J14.TIP_B@1 J14.TIP_T@3 R14.2 U$22.P$15
INPUT_E: J17.TIP_B@1 J17.TIP_T@3 R22.2 U$22.P$19
INPUT_WS: R85.2 U$22.P$20
MIX_OUT: D15.ANODE IC3.8 IC3.9 R35.1
N$1: IC7.2 R93.1 TR_OUT_A.1
N$2: D1.1 J2.9 J2.10
N$3: D2.2 J2.1 J2.2
N$4: IC11.1 IC11.2 J27.TIP_B@1 J27.TIP_T@3
N$5: TR_IN_A.1 U$22.P$4
N$6: ACID1:R24.P$2 IC7.3
N$7: TR_IN_B.1 U$22.P$8
N$8: TR_IN_C.1 U$22.P$12
N$9: FUZZ1:C28.+ TR_IN_C.2 TR_IN_C.3
N$10: IC11.3 R92.2 R97.2 R116.2 R117.2 R118.2
N$11: IC7.9 R95.1 TR_OUT_C.1
N$12: CLIP1:C29.1 CLIP1:R32.1 TR_IN_B.2 TR_IN_B.3
N$13: D16.+ IC11.6 R119.2
N$14: C23.2 C28.+ IC3.3 R28.2
N$15: IC2.3 R1.1 R2.1
N$16: IC6.9 R111.2 R112.1 R113.1
N$17: C24.1 IC3.1 R29.2 R31.1
N$18: IC2.1 J8.TIP_B@1 J8.TIP_T@3 R4.1
N$19: IC2.5 R5.1 R6.1
N$20: IC2.6 R7.1 R8.2
N$21: Q4.E R111.1
N$22: IC6.8 Q4.B
N$23: IC2.7 J5.TIP_B@1 J5.TIP_T@3 R8.1
N$24: IC2.10 R9.1 R10.1
N$25: IC2.9 R11.1 R12.2
N$26: R114.P$3 R115.2
N$27: R113.2 R114.P$2
N$28: IC2.8 J12.TIP_B@1 J12.TIP_T@3 R12.1
N$29: IC2.12 R13.1 R14.1
N$30: IC2.13 R15.1 R16.2
N$31: IC7.6 R94.1 TR_OUT_B.1
N$32: D16.- IC11.7
N$33: IC2.14 J15.TIP_B@1 J15.TIP_T@3 R16.1
N$34: IC6.5 R17.1 R18.1
N$35: IC6.6 R19.1 R20.2
N$36: D19.+ IC11.9 R120.2
N$37: CLIP1:R29.P$2 IC7.5
N$38: IC6.7 J10.TIP_B@1 J10.TIP_T@3 R20.1
N$39: IC6.3 R21.1 R22.1
N$40: IC6.2 R23.1 R24.2
N$41: ACID1:C22.1 ACID1:C23.1 TR_IN_A.2 TR_IN_A.3
N$42: D19.- IC11.8
N$43: IC6.1 J18.TIP_B@1 J18.TIP_T@3 R24.1
N$44: C24.2 IC3.2 R29.1 R30.2
N$45: C29.+ R30.1
N$46: C18.2 IC3.7 R33.2 R48.2
N$47: IC3.5 R34.2
N$48: IC5.4 R37.1 R38.1
N$49: IC5.3 R35.2 R36.2
N$50: IC4.3 IC5.5 R39.1
N$51: C22.1 IC4.2 R40.1
N$52: C22.2 IC4.1 R40.2 R41.1
N$53: R38.2 U$71.2
N$54: D17.ANODE IC4.7 Q1.B
N$55: D17.CATHODE IC4.6 R43.1 R44.2 R45.2
N$56: Q1.E R42.2 R43.2
N$57: IC5.1 Q1.C
N$58: R45.1 U$70.2
N$59: R44.1 R69.P$2
N$60: IC3.13 IC3.14 R47.2
N$61: C17.+ D15.CATHODE IC3.12 R46.2
N$62: C18.1 IC3.6 R48.1
N$63: R51.1 U$74.P$3
N$64: C32.2 IC8.9 R60.2 R61.1
N$65: R49.P$2 R57.2
N$66: J22.TIP_B@1 J22.TIP_T@3 R49.P$3
N$67: D14.CATHODE R57.1 R58.1 R59.2 T1.E
N$68: R50.P$2 R58.2
N$69: C38.2 R74.2 R75.2 U$74.P$1 U$74.P$2
N$70: C33.1 IC8.7 R62.1 R63.2 R64.2
N$71: C33.2 C39.2 IC8.6 R62.2
N$72: C39.1 IC10.5 R52.1
N$73: D5.ANODE D6.CATHODE IC9.3 R63.1
N$74: C34.1 IC9.1 R65.1 R79.2 R80.2
N$75: D7.ANODE D8.CATHODE IC9.5 R79.1
N$76: C34.2 IC9.2 R64.1 R65.2
N$77: C35.2 IC9.6 R66.2 R80.1
N$78: C35.1 IC9.7 R66.1 R67.2 R81.2
N$79: D9.CATHODE D12.ANODE IC9.10 R81.1
N$80: C36.1 IC9.8 R82.2 R83.2 R84.1
N$81: C36.2 IC9.9 R67.1 R84.2
N$82: D10.CATHODE D11.ANODE IC9.12 R82.1
N$83: C40.2 IC9.13 R68.2 R83.1
N$84: C40.1 IC9.14 R68.1 R77.1 R78.1
N$85: D3.ANODE D4.CATHODE IC8.3 R77.2
N$86: C41.2 IC8.2 R76.1 R78.2
N$87: C41.1 IC8.1 R75.1 R76.2 U$92.P$1
N$88: C38.1 IC8.12 R73.2
N$89: C37.1 IC8.14 R70.2
N$90: C37.2 IC8.13 R71.2 R72.1
N$91: D13.CATHODE R56.1 T1.B
N$92: R53.1 T1.C
N$93: IC10.1 R53.2
N$94: IC10.3 R54.2 R85.1
N$95: R86.2 U$93.2
N$96: IC10.4 R55.2 R86.1
N$97: IC10.13 R87.2 R89.1
N$98: IC10.14 R88.2 R90.1
N$99: TR_IN_D.1 U$22.P$16
N$100: CREAM1:R47.1 TR_IN_D.2 TR_IN_D.3
N$101: IC7.13 R96.1 TR_OUT_D.1
N$102: CREAM1:R69.P$2 IC7.12
N$103: FUZZ1:R42.P$2 IC7.10
N$104: D20.+ IC11.13 R121.2
N$105: D20.- IC11.14
N$106: IC5.13 R100.1 R101.1
N$107: IC5.14 R98.2 R99.2
N$108: IC4.12 IC5.12 R102.1
N$109: C44.1 IC4.13 R103.1
N$110: C44.2 IC4.14 R103.2 R104.1
N$111: R101.2 U$111.2
N$112: D18.ANODE IC4.8 Q3.B
N$113: D18.CATHODE IC4.9 R106.1 R107.2 R108.2
N$114: Q3.E R105.2 R106.2
N$115: IC5.16 Q3.C
N$116: R108.1 U$112.2
N$117: R107.1 R109.P$2
N$118: IC2.2 R3.1 R4.2
OPAMP_A: IC7.1 R92.1 TR_OUT_A.2 TR_OUT_A.3 U$22.P$2
OPAMP_B: IC7.7 R97.1 TR_OUT_B.2 TR_OUT_B.3 U$22.P$6
OPAMP_C: IC7.8 R116.1 TR_OUT_C.2 TR_OUT_C.3 U$22.P$10
OPAMP_D: IC7.14 R117.1 TR_OUT_D.2 TR_OUT_D.3 U$22.P$14
OTA_CONTROL: IC10.16 Q4.C
OTA_OUT: IC6.13 IC10.12 R91.2 R110.2
OUTPUT_A: J4.SWITCH_B@1 J4.SWITCH_T@3 J7.TIP_B@1 J7.TIP_T@3 R3.2 U$22.P$1
OUTPUT_B: J9.TIP_B@1 J9.TIP_T@3 J11.SWITCH_B@1 J11.SWITCH_T@3 R7.2 U$22.P$5
OUTPUT_C: J13.TIP_B@1 J13.TIP_T@3 J14.SWITCH_B@1 J14.SWITCH_T@3 R11.2 U$22.P$9
OUTPUT_D: J16.TIP_B@1 J16.TIP_T@3 J17.SWITCH_B@1 J17.SWITCH_T@3 R15.2 U$22.P$13
OUTPUT_E: J19.TIP_B@1 J19.TIP_T@3 R23.2 R98.1 U$22.P$17
OUTPUT_WS: R70.1 R71.1 R118.1 U$22.P$18
VCA_CV_IN1: J21.TIP_B@1 J21.TIP_T@3 R69.P$3
VCA_CV_IN2: J1.TIP_B@1 J1.TIP_T@3 R109.P$3
VCA_OUTPUT1: IC11.5 J6.SWITCH_B@1 J6.SWITCH_T@3 R18.2 R41.2 R90.2
VCA_OUTPUT2: IC11.12 J3.TIP_B@1 J3.TIP_T@3 R19.2 R89.2 R91.1 R104.2
VCA_SIG_IN: IC3.10 R32.1 R33.1

## Tracks (layer width: path | path; a pad name or v marks a point on that pad's centre or on a via)
4.5V  (via drill 0.3)
  Top 0.381: R26.2 107.29,26.53 | 107.29,26.53 R25.1 105.22,27.45 103.97,27.45 103.31,28.11 v103.23,28.11 | U$44.P$2 107.29,26.53 | ACID1:R72.2 39.15,87.84 39.18,87.82 39.18,87.02 40.93,85.27 v41.57,85.27 | v49.83,85.27 52.04,87.47 52.04,92.57 53.63,94.16 57.44,94.16 60.43,91.17 CLIP1:R34.2 | v101.89,28.11 101.89,29.07 104.44,31.62 104.44,36.36 102.21,38.59 79.98,38.59 79.03,39.55 v79.03,69.07 | v76.71,69.49 75.44,69.49 v72.36,72.56 | v72.05,74.79 v72.05,76.69 | v71.97,77.91 71.82,78.06 70.83,78.06 69.66,79.23 v68.36,79.23 | v67.14,77.91 61.49,77.91 v61.35,78.06 | v59.57,77.23 59.47,77.33 v57.76,77.33 | v56.17,80.19 56.17,81.72 v56.12,81.77
  Bottom 0.381: v41.57,85.27 48.9,85.27 48.92,85.28 49.45,85.28 49.47,85.27 v49.83,85.27 52.63,85.27 v56.12,81.77 | v103.23,28.11 v101.89,28.11 | v79.03,69.07 77.13,69.07 v76.71,69.49 | v72.36,72.56 72.36,74.47 v72.05,74.79 | v72.05,76.69 71.97,76.77 v71.97,77.91 | v68.36,79.23 68.36,78.72 67.55,77.91 v67.14,77.91 | v61.35,78.06 60.52,77.23 v59.57,77.23 | v56.17,80.19 56.17,79.84 56.18,79.83 56.18,78.9 v57.76,77.33
9V  (via drill 0.3)
  Top 0.381: CREAM1:R67.2 106.65,76.25 CREAM1:R66.2 107.8,75.11 110.46,75.11 110.91,74.66 CREAM1:R62.1 110.91,65.07 110.46,64.63 106.73,64.63 v106.09,65.26 | C5.2 108.75,33.2 C7.+ 102.58,28.81 IC1.2 | IC1.2 104.34,26.81 R25.2 104.75,26.4 U$42.P$2 | v45.38,82.72 47.28,84.63 v47.28,86.59 | ACID1:JP4.1 45.38,92.2 v47.28,90.29 47.44,90.29 47.97,90.81 50.91,90.81 v51.4,91.3 | v73.94,85.6 73.94,89.4 73.48,89.86 73.48,91.6 CLIP1:Q1.1 71.47,93.61 v71.47,93.67 | v74.9,84.63 75.22,84.31 FUZZ1:Q1.E 76.96,84.95 v78.4,84.95 | v71.35,95.05 68.92,95.05 68.87,95.11 67.55,93.78 62.47,93.78 v62.2,93.52 | v58.71,91.93 58.55,91.77 58.38,91.77 57.83,91.21 53.36,91.21 v53.26,91.31 | v88.87,29.69 94.6,29.69 95.54,28.75 v96.16,28.75 | IC1.2 100.02,26.81 99.03,27.8 99.03,28.43 v98.72,28.75 98.72,29.38 97.13,30.97 97.13,34.15 v93.95,37.32 | v104.93,65.26 98.59,65.26 CREAM1:R57.1 94.14,60.82 v88.87,60.82 | FUZZ1:R42.P$1 89.99,56.69 94.59,56.69 v94.91,56.37 | v96.18,55.1 96.62,54.66 CREAM1:R51.1 93.95,51.8 v93.95,49.7 | FUZZ1:C1.+ 78.1,72.27 v78.71,72.88 79.98,72.88 80.94,71.93 v80.94,71.3 | v79.67,75.37 80.71,76.42 v81.19,76.42 | v82.3,80.92 83.89,80.92 84.75,81.77 84.75,83.04 83.16,84.63 FUZZ1:T1.E | v84.43,66.22 v84.43,64.58 | v84.43,63.36 86.33,61.45 v87.6,61.45 | v93.95,47.48 v93.95,39.24
  Bottom 0.381: CLIP1:JP2.1 v45.38,82.72 | v47.28,86.59 47.28,87.84 47.61,88.17 47.61,88.71 47.28,89.04 v47.28,90.29 | v73.94,85.6 v74.9,84.63 | v71.47,93.67 71.35,93.78 v71.35,95.05 | v62.2,93.52 60.62,91.93 v58.71,91.93 | v53.26,91.31 53.25,91.3 v51.4,91.3 | FUZZ1:R43.P$1 88.6,29.97 v88.87,29.69 | v96.16,28.75 v98.72,28.75 | v104.93,65.26 v106.09,65.26 | FUZZ1:R42.P$1 88.6,60.54 | v94.91,56.37 v96.18,55.1 | v78.4,84.95 82.52,84.95 FUZZ1:T1.E | v78.71,72.88 78.71,74.15 79.67,75.11 v79.67,75.37 | v81.19,76.42 81.19,76.58 81.18,76.59 81.18,80.11 81.98,80.92 v82.3,80.92 | v80.94,71.3 84.43,67.8 v84.43,66.22 | v84.43,64.58 v84.43,63.36 | v87.6,61.45 88.24,60.82 88.32,60.82 | 88.6,60.54 88.32,60.82 | 88.32,60.82 v88.87,60.82 88.6,60.54 | v93.95,49.7 v93.95,47.48 | v93.95,39.24 v93.95,37.32
12V  (via drill 0.3)
  Top 0.381: IC4.4 C15.2 | IC7.4 C42.2 90.9,85.71 91.1,85.9 v91.99,85.9 | C21.2 IC8.4 129.55,43.67 129.56,43.69 130.45,43.69 131.09,43.05 v131.09,42.09 | C1.2 154.79,27.48 | 154.79,27.48 154.79,27.99 C3.+ 154.91,28.75 155.87,29.7 159.68,29.7 160.63,28.75 165.71,28.75 166.47,29.51 R115.1 | v103.54,26.16 103.54,24.8 U$13.P$2 98.87,26.81 IC1.1 98.02,29.14 v97.46,29.7 | IC3.4 C26.2 v29.5,45.4 | IC9.4 v154.91,45.9 | D1.2 154.79,27.48 | D1.2 150.25,28.34 148.44,30.14 R50.P$3 | v43.47,81.45 43.47,76.69 44.42,75.74 CLIP1:JP2.3 47.28,73.83 v47.28,70.98 | v43.47,82.72 43.47,85.27 ACID1:JP4.3 | J21.SWITCH_T@3 12.04,40.18 15.21,43.35 v16.17,43.35 | v18.07,43.35 v26.96,43.35 | v33.39,45.26 38.07,45.26 v39.03,44.31 | v41.51,44.31 44.54,41.28 50.93,41.28 51.73,42.09 | 51.73,42.09 52.04,42.4 | 52.04,42.4 52.36,42.72 | 52.36,42.72 IC5.11 C13.2 53,47.04 v53.31,47.04 | v57.12,47.16 57.12,49.7 v55.54,51.29 | v47.28,68.44 47.28,63.36 47.92,62.72 49.63,62.72 C9.2 IC2.4 53.31,61.77 54.46,60.63 v54.46,59.67 | C15.2 61.8,41.45 61.01,42.24 59.53,42.24 59.33,42.03 v54.34,42.03 | v52.68,41.77 52.36,42.09 | 52.36,42.09 52.36,42.72 | 52.36,42.09 52.04,42.4 | 52.36,42.09 51.73,42.09 | v58.08,33.51 65.38,33.51 v66.33,34.47 65.7,35.1 v65.7,35.72 | v65.7,37.02 65.06,37.65 v65.06,40.05 | v62.84,40.73 62.12,41.45 C15.2 | v51.97,57.96 51.97,54.86 v53.95,52.88 | v106.34,28.43 C8.+ 112.69,28.43 113.76,27.35 C6.2 116.94,29.7 v118.4,29.7 | v39.34,16.05 39.34,16.68 43.15,20.5 43.15,21.13 43.47,21.45 48.23,21.45 49.19,22.4 49.19,26.53 51.26,28.6 52.56,28.6 55.26,31.3 v56.79,31.3 | v78.4,33.2 84.43,33.2 87.29,30.34 95.22,30.34 v95.86,29.7
  Top 0.381: v120.31,32.24 126.02,32.24 126.66,32.88 127.61,32.88 128.88,34.15 v129.83,34.15 134.28,34.15 v134.59,33.83 | v129.83,36.05 v129.83,38.91 | v96.54,86.67 96.54,93.25 v96.71,93.42 | v98.08,94.16 99.03,93.2 v103.8,93.2 | v103.8,91.93 104.11,91.61 v104.11,81.77 | v106.02,81.77 115.23,81.77 116.18,82.72 124.32,82.72 v124.37,82.67 | v124.43,81.45 125.49,80.39 v125.49,76.06 | v126.97,75.74 v132.69,75.74 133.64,76.69 IC10.11 133.64,79.55 134.91,80.82 C19.2 136.37,81.01 v136.4,81.04 | C45.2 145.39,88.76 | 145.39,88.76 IC11.4 | v138.82,83.46 139.67,84.31 144.75,84.31 145.39,84.95 145.39,88.76 | C30.2 v154.91,45.9 | v154.91,45.9 154.91,50.34 v154.6,50.66 | v152.69,54.47 152.69,58.91 v153.64,59.87 | v153.96,65.58 153.64,65.58 153.2,66.03 C11.2 IC6.4 149.2,66.53 146.98,64.31 v146.34,64.31 | v136.5,33.83 137.45,33.83 140.63,30.66 140.63,29.38 141.58,28.43 v143.8,28.43 | D1.2 150.25,35.51 151.1,36.37 157.77,36.37 159.99,38.59 v159.99,45.58
  Bottom 0.381: v103.54,26.16 105.81,28.43 v106.34,28.43 | v132.69,75.74 132.69,68.44 133.59,67.53 U$93.1 133.59,65.63 133.96,65.26 137.13,65.26 138.09,64.31 v146.34,64.31 | v43.47,81.45 v43.47,82.72 | v16.17,43.35 v18.07,43.35 | v26.96,43.35 29.01,45.4 v29.5,45.4 29.64,45.26 v33.39,45.26 | v39.03,44.31 v41.51,44.31 | v53.31,47.04 57,47.04 v57.12,47.16 | v55.54,51.29 54.85,51.98 U$111.3 54.35,52.48 v53.95,52.88 | v47.28,68.44 v47.28,70.98 | v54.34,42.03 53.76,41.45 53,41.45 v52.68,41.77 | U$70.3 57.08,33.88 57.44,33.51 v58.08,33.51 58.08,32.59 v56.79,31.3 | U$71.3 65.01,28.7 66.01,29.7 66.01,31.29 66.33,31.61 v66.33,34.47 66.41,34.55 U$112.3 68.59,33.2 v78.4,33.2 | v65.7,35.72 v65.7,37.02 | v65.06,40.05 63.52,40.05 v62.84,40.73 | v54.46,59.67 52.74,57.96 v51.97,57.96 | U$22.12V 36.49,13.19 v39.34,16.05 | v95.86,29.7 v97.46,29.7 | v120.31,32.24 120.31,30.66 119.35,29.7 v118.4,29.7 | v129.83,34.15 v129.83,36.05 | v129.83,38.91 131.09,40.17 v131.09,42.09 | v91.99,85.9 95.77,85.9 v96.54,86.67 | v96.71,93.42 97.45,94.16 v98.08,94.16 | v103.8,93.2 v103.8,91.93 | v104.11,81.77 v106.02,81.77 | v124.37,82.67 124.43,82.62 v124.43,81.45 | v125.49,76.06 125.81,75.74 v126.97,75.74 | v136.4,81.04 v138.82,83.46 | v154.6,50.66 152.69,52.56 v152.69,54.47 | v153.64,59.87 153.96,60.18 v153.96,65.58 | v134.59,33.83 v136.5,33.83 | v143.8,28.43 145.31,28.43 R50.P$3 | v159.99,45.58 155.23,45.58 v154.91,45.9
-12V  (via drill 0.3)
  Top 0.381: C16.1 IC4.11 67.92,41.45 66.65,40.18 66.65,36.69 66.33,36.37 v58.08,36.37 | IC7.11 C43.1 100.81,85.08 101.57,84.31 v103.47,84.31 | C25.1 IC8.11 132.69,43.67 131.74,42.72 131.74,39.23 132.05,38.91 134.59,38.91 135.55,37.96 D2.1 | IC5.6 C14.1 52.42,36.43 v53.69,36.43 | IC3.11 C27.1 29.63,56.05 v30.27,56.05 | C10.1 IC2.11 57.71,61.77 v57.39,62.09 | IC6.11 C12.1 143.29,65.07 142.85,64.63 139.99,64.63 139.62,64.26 v139.62,63.04 | IC9.11 C31.1 155.03,55.09 v155.87,55.09 | IC10.6 C20.1 134.78,71.11 135.86,70.03 v135.86,68.12 | R59.1 130.78,64.94 | 130.78,64.94 131.42,64.31 | 131.42,64.31 133.32,64.31 134.28,65.26 134.28,66.53 v135.86,68.12 | v68.29,34.47 67.6,34.47 66,32.87 v62.2,32.87 | v51.41,80.2 51.41,81.14 v50.14,82.41 | v49.19,84.63 ACID1:JP5.3 | v31.56,56.65 32.79,56.65 v34.9,54.54 | v36.58,54.56 37.74,53.4 v38.28,53.4 | v40.63,53.53 41.25,54.15 49.82,54.15 v51.41,52.56 | v49.19,74.48 CLIP1:JP3.3 50.14,75.74 51.41,77.01 v51.41,77.63 | v49.19,73.19 v49.19,70.98 | v49.19,69.12 51.73,66.58 v51.73,65.26 | v53.63,63.04 54.58,62.09 v55.59,62.09 55.22,61.72 v55.22,60.5 | v51.09,57.01 v51.09,55.37 | v55.66,38.27 55.66,40.67 v55.85,40.87 | v55.85,42.68 v55.85,45.26 | v78.4,34.47 84.43,34.47 87.6,31.29 95.54,31.29 96.81,30.02 96.81,26.21 99.67,23.35 U$41.P$1 99.67,22.08 100.62,21.13 110.78,21.13 111.73,22.08 111.73,24.94 112.37,25.57 114.59,25.57 114.91,25.89 114.91,26.53 116.81,28.43 v118.4,28.43 | D2.1 128.34,32.02 125.7,29.38 125.7,29.07 125.07,28.43 v122.21,28.43 | v106.46,84.31 106.46,83.24 106.65,83.04 112.71,83.04 112.73,83.07 113.27,83.07 113.3,83.04 113.64,83.04 113.96,82.72 v113.96,82.42
  Top 0.381: v113.96,80.5 113.96,79.23 114.59,78.6 116.5,78.6 117.45,77.64 117.45,72.88 120.94,69.39 v123.8,69.39 | v124.43,68.12 R56.2 124.88,66.53 126.97,66.53 127.29,66.22 v127.29,64.54 | v129.2,64.55 130.39,64.55 130.78,64.94 | IC11.11 C46.1 155.1,89.27 155.31,89.47 v155.87,89.47 | v135.86,68.12 135.86,67.17 137.77,65.26 v137.77,63.04 | v152.04,56.69 151.73,56.37 v145.71,56.37 | v141.9,56.37 135.55,56.37 135.23,56.69 v135.23,57.96 | v135.23,60.45 131.42,64.26 131.42,64.31 | v143.8,27.16 C4.- 139.8,28.3 C2.1 139.8,30.21 137.99,32.02 D2.1 | v151.1,28.79 151.1,34.78 151.74,35.42 158.41,35.42 160.95,37.96 160.95,42.4 162.22,43.67 164.44,43.67 165.39,44.62 165.39,52.42 165.35,52.47 165.35,53.24 163.49,55.1 v162.8,55.1 | v160.95,55.1 160.95,58.91 161.58,59.55 v161.58,65.26 | v156.18,87.45 156.22,87.49 156.18,87.49 162.85,80.82 162.85,76.69 160.31,74.15 v160.31,67.17
  Bottom 0.381: U$93.3 135.59,67.85 v135.86,68.12 | v58.08,36.37 53.76,36.37 v53.69,36.43 | v58.08,36.37 58.08,35.55 U$70.1 60.52,34.55 62.2,32.87 | v68.29,34.47 69.16,34.47 U$112.1 78.32,34.55 v78.4,34.47 | v50.14,82.41 49.19,83.36 v49.19,84.63 | v30.27,56.05 30.96,56.05 v31.56,56.65 | v34.9,54.54 36.56,54.54 v36.58,54.56 | v38.28,53.4 40.5,53.4 v40.63,53.53 | U$111.1 54,49.98 v51.41,52.56 51.09,52.88 v51.09,55.37 55.59,55.37 59.03,51.93 59.03,50.02 58.71,49.7 58.71,47.48 57.44,46.21 56.81,46.21 v55.85,45.26 | v49.19,74.48 v49.19,73.19 | v49.19,70.98 v49.19,69.12 | v51.73,65.26 53.63,63.36 v53.63,63.04 | v55.59,62.09 v57.39,62.09 | U$71.1 64.37,30.7 62.2,32.87 | v51.09,57.01 51.09,58.28 53.31,60.5 v55.22,60.5 | v58.08,36.37 56.81,36.37 55.66,37.52 v55.66,38.27 | v55.85,40.87 v55.85,42.68 | v122.21,28.43 v118.4,28.43 | v103.47,84.31 v106.46,84.31 | v113.96,82.42 v113.96,80.5 | v123.8,69.39 124.43,68.75 v124.43,68.12 | v127.29,64.54 129.18,64.54 v129.2,64.55 | v137.77,63.04 v139.62,63.04 | v152.04,56.69 154.16,56.69 155.64,55.2 155.75,55.2 v155.87,55.09 155.88,55.1 v160.95,55.1 v162.8,55.1 | v145.71,56.37 v141.9,56.37 | v135.23,57.96 v135.23,60.45 | v143.8,27.16 149.48,27.16 v151.1,28.79 | v156.18,87.45 155.87,87.76 v155.87,89.47 | v51.41,77.63 v51.41,80.2 | 62.2,32.87 v62.2,32.87 | v161.58,65.26 161.58,65.9 v160.31,67.17
ACID1:ACIDNE  (via drill 0.3)
  Top 0.254: ACID1:IC5.4 31.04,87.17 v31.7,86.51 | v34.02,86.41 37.56,86.41 v37.68,86.53 | v39.98,88.12 40.28,88.12 40.37,88.21 42.66,88.21 v42.89,88.44 | v44.11,88.44 47.92,88.44 ACID1:JP5.2
  Top 0.381: ACID1:C24.1 30.26,86.98 ACID1:IC5.4
  Bottom 0.254: v31.7,86.51 33.92,86.51 v34.02,86.41 | v37.68,86.53 38.39,86.53 v39.98,88.12 | v42.89,88.44 v44.11,88.44
ACID1:ACIDPL
  Top 0.381: ACID1:C7.+ 32.68,91.61 34.58,89.71 ACID1:IC5.7 36.61,89.71 ACID1:C25.1 44.23,90.85 ACID1:JP4.2
ACID1:ACIDVI  (via drill 0.3)
  Top 0.254: ACID1:IC5.3 33.58,88.44 33.9,88.76 33.9,88.86 34.1,89.06 v36.73,89.06
  Top 0.381: ACID1:R25.1 27.6,89.08 28.23,88.44 ACID1:IC5.3
  Bottom 0.254: v36.73,89.06 40.92,89.06 ACID1:JP6.2
ACID1:N$2
  Top 0.254: ACID1:D4.A ACID1:D3.C ACID1:JP1.3
ACID1:N$3
  Top 0.254: ACID1:JP1.1 7.28,101.14 16.17,92.25 ACID1:D1.CATHODE 17.12,90.98 19.66,90.98 19.99,90.65 ACID1:D2.ANODE
ACID1:N$20
  Top 0.254: ACID1:R25.2 ACID1:C23.2
ACID1:N$22  (via drill 0.3)
  Top 0.254: ACID1:C26.2 27.28,90.98 28.55,89.71 | 28.55,89.71 28.87,89.71 | 28.87,89.71 ACID1:IC5.2 | ACID1:R27.1 31.91,85.58 32.31,85.98 32.31,86.73 31.25,87.79 v28.55,87.79 | v28.55,89.09 28.55,89.39 | 28.55,89.39 28.55,89.71 | 28.55,89.39 28.87,89.71
  Bottom 0.254: v28.55,87.79 v28.55,89.09
ACID1:N$23
  Top 0.254: ACID1:C26.1 ACID1:R26.1
ACID1:N$32
  Top 0.254: ACID1:C27.1 38.26,87.17 37.76,87.17 36.49,88.44 ACID1:IC5.6 34.58,88.44 33.44,87.3 ACID1:R27.2
ACID1:N$33  (via drill 0.3)
  Top 0.254: ACID1:R26.2 26.14,93.2 25.06,93.2 24.1,92.25 24.1,87.17 v25.06,86.22 | v25.06,84.31 v25.06,74.15 | v25.06,71.93 27.28,69.71 35.22,69.71 35.85,69.07 35.85,60.5 37.44,58.91 37.44,55.9 ACID1:R23.P$3
  Bottom 0.254: v25.06,86.22 v25.06,84.31 | v25.06,74.15 v25.06,71.93
ACID1:N$34  (via drill 0.3)
  Top 0.254: ACID1:JP1.2 8.86,92.57 8.86,90.03 11.72,87.17 22.01,87.17 ACID1:C28.2 22.01,87.36 24.42,84.95 24.42,73.83 26.01,72.25 33.79,72.25 ACID1:R24.P$3 | ACID1:R22.P$3 40.34,40.22 40.93,40.81 40.93,44.31 v39.66,45.58 | v38.39,46.85 36.49,48.75 36.49,53.83 33.63,56.69 33.63,59.87 35.22,61.45 v35.22,68.75
  Bottom 0.254: v39.66,45.58 v38.39,46.85 | v35.22,68.75 35.22,70.74 ACID1:R24.P$3
ACID1:N$35
  Top 0.254: ACID1:C27.2 37.88,85.27 ACID1:R28.2
ACID1:N$36  (via drill 0.3)
  Top 0.254: ACID1:R22.P$1 36.21,31.09 36.8,31.09 ACID1:R22.P$2 37.76,38.59 40.3,41.13 40.3,43.99 39.03,45.26 39.03,53.48 v38.06,54.45 | ACID1:R28.1 35.22,85.14 v35.22,77.01 | v35.22,74.15 35.22,72.56 36.49,71.3 36.49,60.82 38.09,59.21 v38.09,56.07
  Bottom 0.254: v35.22,77.01 v35.22,74.15 | v38.09,56.07 38.09,54.48 v38.06,54.45
ACID1:TO4.5V  (via drill 0.3)
  Top 0.254: ACID1:R72.1 38.71,90.15 v38.71,90.2 | v38.71,91.61 39.34,92.25 ACID1:JP6.1
  Bottom 0.254: v38.71,90.2 v38.71,91.61
BIASINPUT  (via drill 0.3)
  Top 0.254: R61.2 132.88,41.77 v132.38,42.27 | v132.37,44.31 132.37,46.21 v132.74,46.58 | v137.13,52.88 140.94,52.88 141.26,53.2 141.9,53.2 142.53,53.83 142.53,59.36 v142.43,59.45 | v149.83,65.89 149.5,65.89 147.29,63.67 146.26,63.67 145.71,63.12 v145.71,62.09 | v149.83,67.18 149.83,67.8 148.56,69.07 148.56,71.12 v148.88,71.44 | v148.88,73.2 150.47,73.2 151.74,74.47 151.74,75.42 154.6,78.28 J23.TIP_B@1
  Bottom 0.254: v132.38,42.27 132.38,44.3 v132.37,44.31 | v132.74,46.58 132.74,48.49 v137.13,52.88 | v142.43,59.45 144.97,59.45 145.71,60.18 v145.71,62.09 | v149.83,65.89 v149.83,67.18 | v148.88,71.44 v148.88,73.2
BIASMAINLINE  (via drill 0.3)